# EAGLE board PCC Robotics Keychain PCB (EAGLE 7.1.0)

Size 100 x 80 mm. Coordinates in mm from the lower left corner, seen from the top.
Outline: 100,0 100,80 0,80
Outline: 49,0 1.8,0 arc-90 0,1.8 0,23.6 arc-90 1.8,25.4 49,25.4 arc-90 50.8,23.6 50.8,1.8 arc-90 49,0
Copper layers (1*16): Top 0.035mm / dielectric 1.5mm / Bottom 0.035mm
Design rules "default": minimum track width 10mil, minimum drill 0.6mm, track to track 8mil, track to pad 8mil, pad to pad 8mil, via to via 8mil, smd to smd 8mil, copper to edge 40mil, drill to drill 8mil, minimum pad ring 10mil, minimum via ring 8mil, stop-mask expansion 4mil, vias tented up to drill 0mil, thermal gap 10mil
Holes 2.2 mm at 2.54,22.86 48.26,22.86 48.26,2.54 2.54,2.54

## Footprints (pad centres in the part's own frame; a part is rotated, then mirrored left to right if it is on the bottom)
1X08-NFNS = drill 1.016 pad 1.88: 1 -8.89,0; 2 -6.35,0; 3 -3.81,0; 4 -1.27,0; 5 1.27,0; 6 3.81,0; 7 6.35,0; 8 8.89,0
1X05-NOSILK = drill 1.016 pad 1.88: 1 -5.08,0; 2 -2.54,0; 3 0,0; 4 2.54,0; 5 5.08,0

## Placement (x,y rotation side)
J1  1X08NFNS  [1X08-NFNS]  15.24,22.86 0 top
J2  1X08NFNS  [1X08-NFNS]  15.24,2.54 0 top
J3  1X08NFNS  [1X08-NFNS]  35.56,2.54 0 top
J4  1X08NFNS  [1X08-NFNS]  35.56,22.86 0 top
J5  1X05NOSILK  [1X05-NOSILK]  6.35,20.32 0 top
J6  1X05NOSILK  [1X05-NOSILK]  19.05,20.32 0 top
J7  1X05NOSILK  [1X05-NOSILK]  31.75,20.32 0 top
J8  1X05NOSILK  [1X05-NOSILK]  44.45,20.32 0 top
J9  1X05NOSILK  [1X05-NOSILK]  6.35,17.78 0 top
J10  1X05NOSILK  [1X05-NOSILK]  19.05,17.78 0 top
J11  1X05NOSILK  [1X05-NOSILK]  31.75,17.78 0 top
J12  1X05NOSILK  [1X05-NOSILK]  44.45,17.78 0 top
J13  1X05NOSILK  [1X05-NOSILK]  6.35,5.08 0 top
J14  1X05NOSILK  [1X05-NOSILK]  19.05,5.08 0 top
J15  1X05NOSILK  [1X05-NOSILK]  31.75,5.08 0 top
J16  1X05NOSILK  [1X05-NOSILK]  44.45,5.08 0 top
J17  1X05NOSILK  [1X05-NOSILK]  6.35,7.62 0 top
J18  1X05NOSILK  [1X05-NOSILK]  19.05,7.62 0 top
J19  1X05NOSILK  [1X05-NOSILK]  31.75,7.62 0 top
J20  1X05NOSILK  [1X05-NOSILK]  44.45,7.62 0 top
U$1  [OSHW-LOGO-S]  47.62,11.43 0 top
U$2  [OSHW-LOGO-S]  3.17,11.43 0 top

## Library data of the parts
J1-J20 = Ai_Connectors
U$1 U$2 = Ai_Miscellany

## Text on the board
tNames: PASADENA CITY COLLEGE ROBOTICS | pasadenarobotics@gmail.com
bNames: SIRR-Tech